# Altium PCB pcb Rev1.1.2_2021-03-04.pcbdoc (part 1 of 2)
Units mil, origin at the board's own origin, x right, y up, seen from the top; angles counter-clockwise.
Board outline 3907.67 x 3907.67 mil, 2 copper layers (Top Layer, Bottom Layer); 144 components, 104 nets, 451 pads, 133 vias.
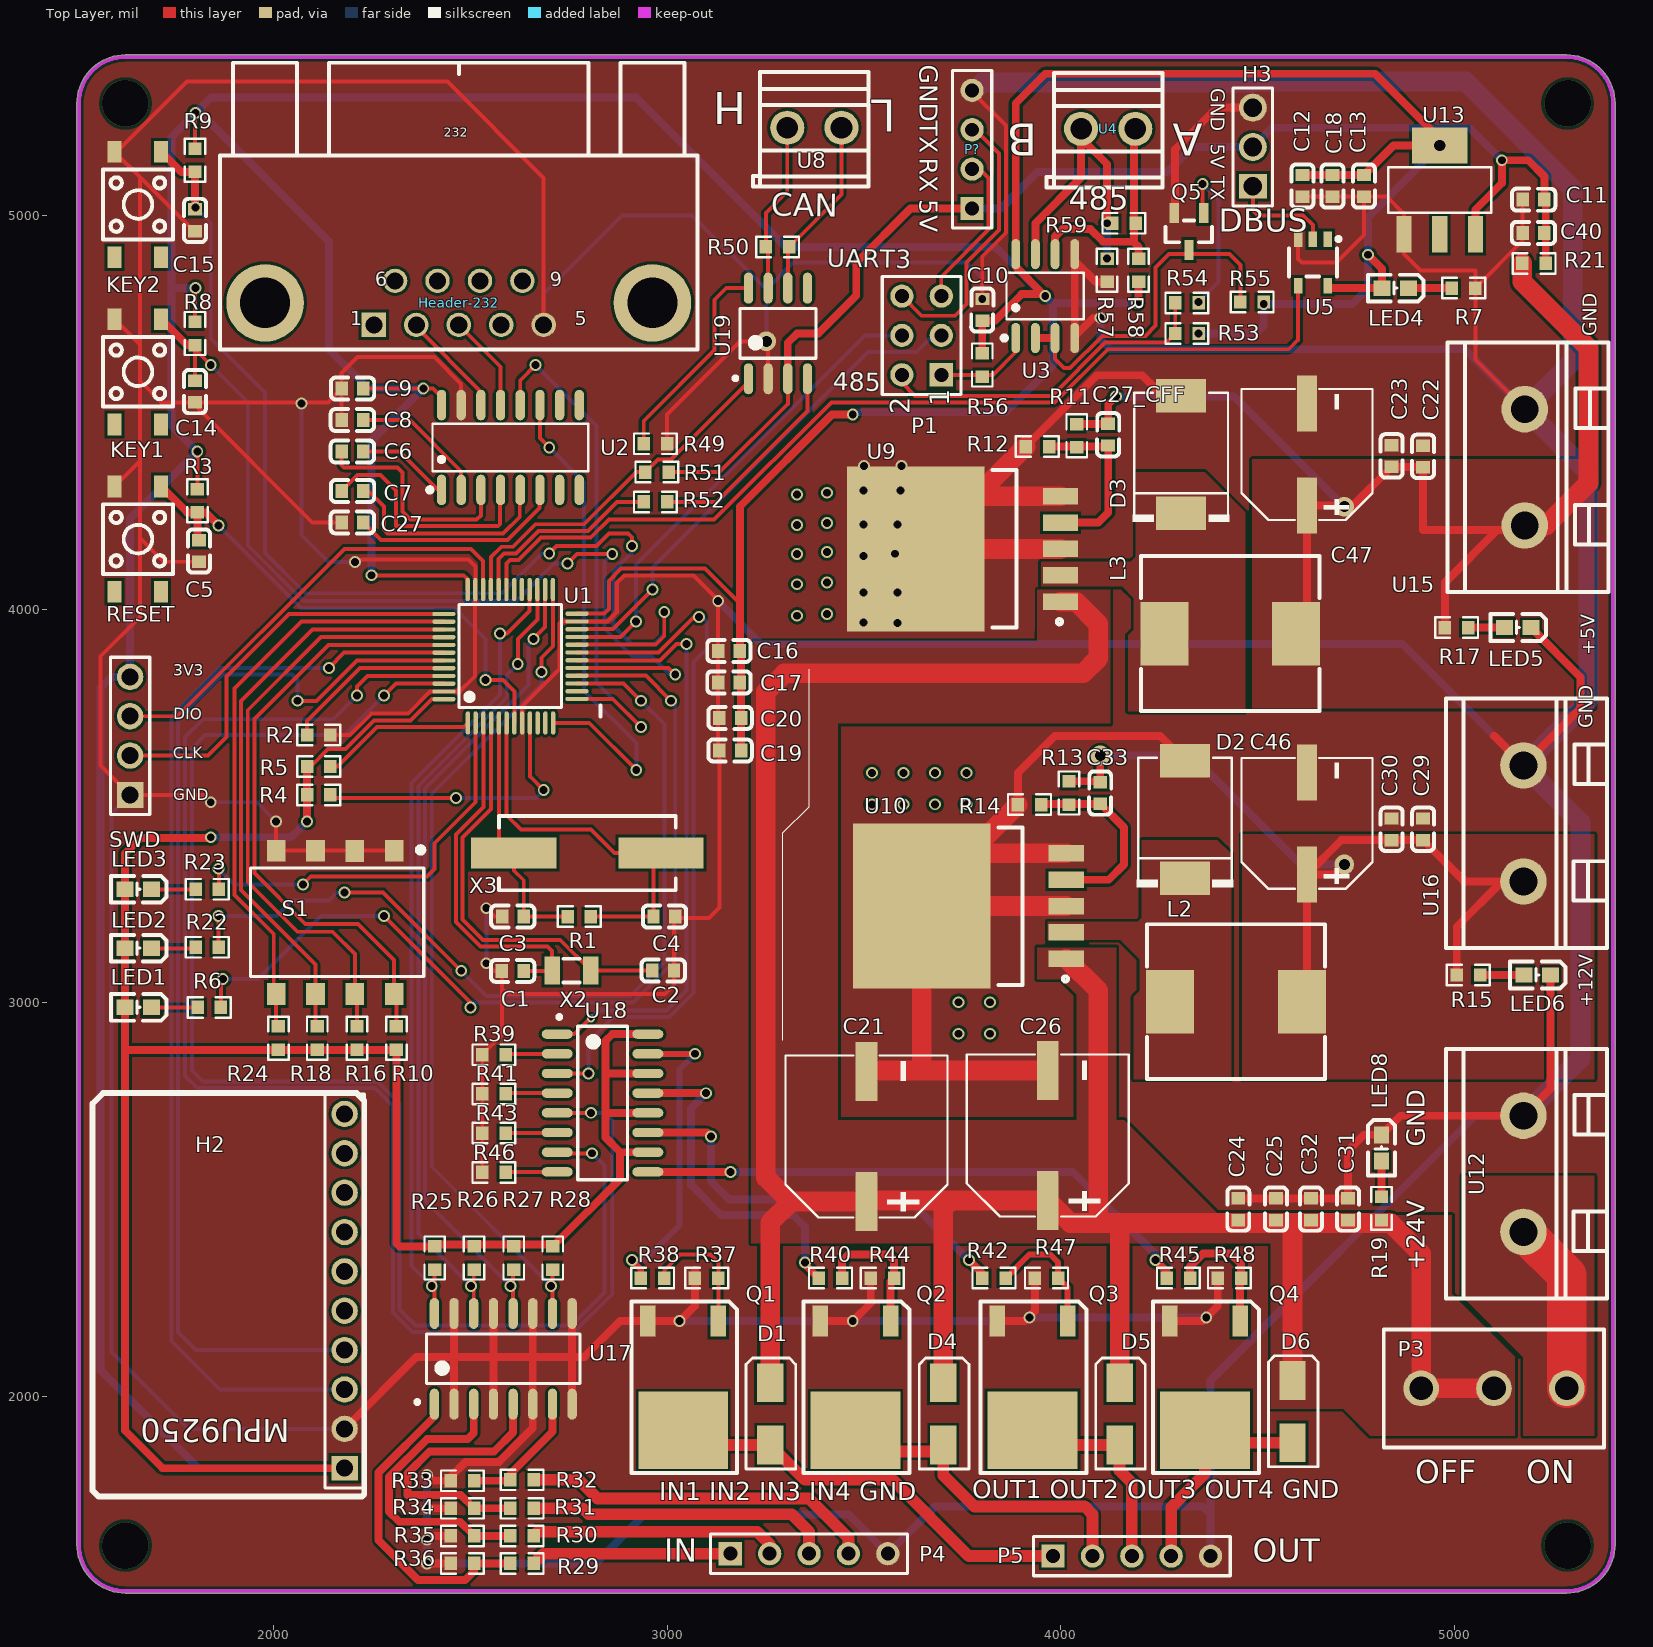
[diagram p0: Top Layer view]
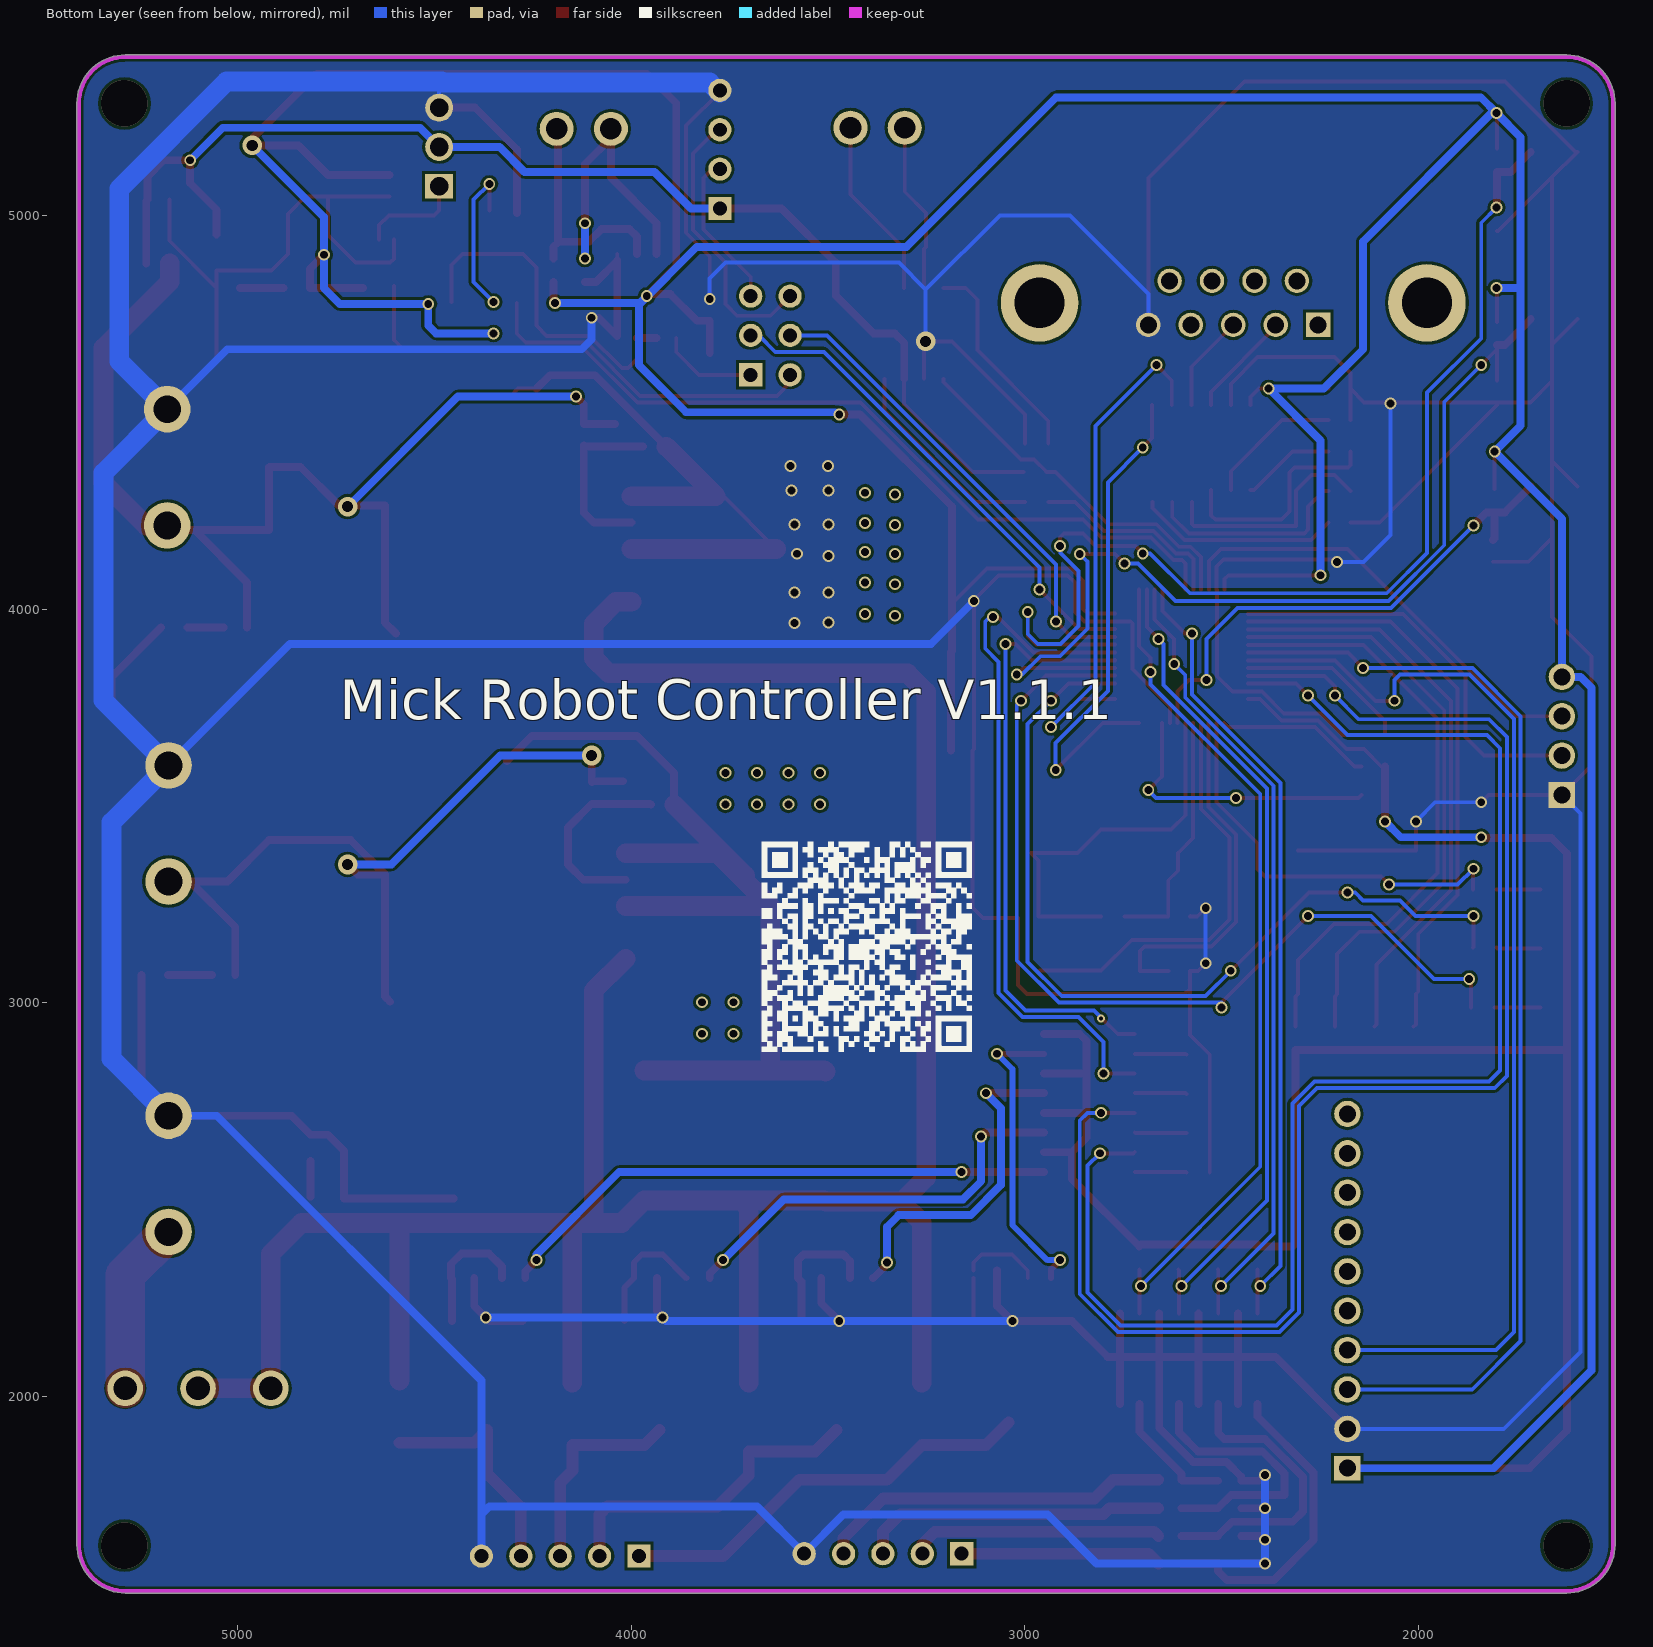
[diagram p1: Bottom Layer view, seen from below]

## Layer stack, top to bottom
Top Solder: solder mask 0.4, Solder Resist, Dk 3.5
Top Layer: signal copper 1.4
Dielectric1: dielectric 12.6, FR-4, Dk 4.8
Bottom Layer: signal copper 1.4
Bottom Solder: solder mask 0.4, Solder Resist, Dk 3.5

## Board outline
1499.98,1623.11 1499.98,5284.53 cw(c1623.11,5284.53) 1623.11,5407.65 5284.53,5407.65 cw(c5284.53,5284.53) 5407.65,5284.53 5407.65,1623.11 cw(c5284.53,1623.11) 5284.53,1499.98 1623.11,1499.98 cw(c1623.11,1623.11)

## Design rules (kind name [scope] priority, off if disabled: settings)
Clearance [All] p1: gap=7 ignorepadtopadclearanceinfootprint=FALSE except(0: Arc-Hole Track-Hole SMDPad-Hole THPad-Hole Via-Hole Fill-Hole Poly-Hole Region-Hole Text-Hole)
HoleSize [All] p1: absolutevalues=TRUE maxlimit=1000 minlimit=1 maxpercent=80.000 minpercent=20.000
HoleToHoleClearance [All] p1: gap=0 allowstackedmicrovias=TRUE
MinimumSolderMaskSliver [All] p1: minsoldermaskwidth=0
PolygonConnect [All] p1: connectstyle=Direct reliefconductorwidth=10 reliefentries=4 polygonreliefangle="90 Angle" airgapwidth=10
RoutingVias [All] p1: holewidth=28 width=50 viastyle="Through Hole" minholewidth=28 minwidth=50 maxholewidth=28 maxwidth=50
SilkToSilkClearance [All] p1: silktosilkclearance=0
SilkToSolderMaskClearance [IsPad] p1: minsilkscreentomaskgap=0 clearancetoexposedcopper=TRUE
SolderMaskExpansion [All] p1: expansion=4
Width [InNet('+3V3')] p1: maxlimit=100 minlimit=10 preferedwidth=20 toplayer_maxwidth=25 minimp=50.000000 maximp=50.000000 favimp=50.000000
25 further rules are at their usual default settings.

## Classes and differential pairs
component class sch_Rev1.1.1_2021-03-04: C1 C2 C3 C4 C5 C6 C7 C8 C9 C10 C11 C12 C13 C14 C15 C16 C17 C18 C19 C20 C21 C22 C23 C24 C25 C26 C27 C27_CFF C29 C30 C31 C32 C33 C40 C46 C47 D2 D3 H2 H3 Header-232 KEY1 KEY2 L2 L3 LED1 LED2 LED3 LED4 LED5 LED6 LED8 P1 P3 P? Q5 R1 R2 R3 R4 R5 R6 R7 R8 R9 R10 R11 R12 R13 R14 R15 R16 R17 R18 R19 R21 R22 R23 R24 R49 R50 R51 R52 R53 R54 R55 R56 R57 R58 R59 RESET S1 SWD U1 U2 U3 U4 U5 U8 U9 U10 U12 U13 U15 U16 U19 X2 X3
component class Sheet3: D1 D4 D5 D6 P4 P5 Q1 Q2 Q3 Q5 R25 R26 R27 R28 R29 R30 R31 R32 R33 R34 R35 R36 R37 R38 R39 R40 R41 R42 R43 R44 R45 R46 R47 R48 U17 U18

## Components (designator, comment, footprint, x,y, rotation, side; value= is the part's Value field where it differs from the comment)
C1 "15pF" C0603 2607.27,3080.55 r0 top
C2 "15pF" C0603 2989.17,3081.55 r180 top
C3 "22pF" C0603 2607.56,3218.55 r0 top
C4 "22pF" C0603 2992.45,3218.55 r180 top
C5 "100nF" C0603 1810,4147.64 r90 top
C6 "100nF" C0603 2200,4400 r0 top
C7 "100nF" C0603 2200,4300 r180 top
C8 "100nF" C0603 2200,4480 r0 top
C9 "100nF" C0603 2200,4560 r180 top
C10 "100nF" C0603 3800.11,4760 r90 top
C11 "100nF" C0603 5200.58,5040.02 r180 top
C12 "100nF" C0603 4613.61,5075.1 r90 top
C13 "100nF" C0603 4769.8,5075.1 r90 top
C14 "100nF" C0603 1800,4552.64 r90 top
C15 "100nF" C0603 1800,4987.64 r90 top
C16 "100nF" C0603 3156.58,3893.64 r0 top
C17 "100nF" C0603 3156.58,3813.64 r0 top
C18 "100nF" C0603 4689.8,5075.1 r90 top
C19 "100nF" C0603 3159.78,3640.47 r0 top
C20 "100nF" C0603 3159.78,3723.34 r0 top
C21 "270uF" CAP-SMD_BD10.0-L10.3-W10.3-RD 3505.88,2660 r90 top
C22 "1uF" C0603 4920,4387.63 r270 top
C23 "10nF" C0603 4840,4388.79 r270 top
C24 "1uF" C0603 4450.32,2475.12 r270 top
C25 "10nF" C0603 4546.12,2475.12 r270 top
C26 "270uF" CAP-SMD_BD10.0-L10.3-W10.3-RD 3966.54,2662.36 r90 top
C27 "100nF" C0603 2200,4220 r0 top
C27_CFF "3.3nF" C0603 4120,4442.96 r90 top
C29 "1uF" C0603 4920,3440.28 r270 top
C30 "10nF" C0603 4840,3440.28 r270 top
C31 "1uF" C0603 4729.35,2475.12 r270 top
C32 "10nF" C0603 4635.16,2475.12 r270 top
C33 "1nF" C0603 4099.77,3532.64 r90 top
C40 "470nF" C0603 5200.58,4955.37 r0 top
C46 "220uF" CAP-SMD_BD8.0-L8.3-W8.3-RD 4625,3455.28 r90 top
C47 "220uF" CAP-SMD_BD8.0-L8.3-W8.3-RD 4625,4392.64 r90 top
D1 "SMAJ5.0A" DO214-SMA-SOAC 3260,1960 r90 top
D2 "B540C-13-F" SMC_L6.9-W5.9-LS7.9-RD 4315,3465.28 r90 top
D3 "B540C-13-F" SMC_L6.9-W5.9-LS7.9-RD 4305,4392.64 r90 top
D4 "SMAJ5.0A" DO214-SMA-SOAC 3700,1960 r90 top
D5 "SMAJ5.0A" DO214-SMA-SOAC 4148.04,1960 r90 top
D6 "SMAJ5.0A" DO214-SMA-SOAC 4587.04,1966 r90 top
H2 "Header-MPU9250" HDR-TH_10P-P2.54-V 2180,2267.22 r90 top
H3 "Header-3P-DBUS" HDR-TH_3P-P2.54-V 4487.37,5173.78 r90 top
Header-232 "Header-232" DSUB-TH_9P-P2.74-S2.84_L18.5-W30.8-M 2470,4777.64 r180 top
KEY1 "TS-1109S-B-B" SW-SMD_4P-L4.5-W4.5-P3.00-LS7.0 1655,4602.64 r90 top
KEY2 "TS-1109S-B-B" SW-SMD_4P-L4.5-W4.5-P3.00-LS7.0 1655,5027.64 r90 top
L2 "68uH 3A" IND-SMD_L11.5-W10.0_104CDMCCDS 4444.58,3002.28 r0 top
L3 "68uH 3A" IND-SMD_L11.5-W10.0_104CDMCCDS 4430,3937.64 r0 top
LED1 "KT-0603R" LED0603-R-RD 1656,2987.91 r180 top
LED2 "KT-0603R" LED0603-R-RD 1656,3138.05 r180 top
LED3 "KT-0603R" LED0603-R-RD 1656,3287.91 r180 top
LED4 "KT-0603R" LED0603-R-RD 4849.06,4815.19 r180 top
LED5 "KT-0603R" LED0603-R-RD 5160.4,3952.94 r180 top
LED6 "KT-0603R" LED0603-R-RD 5210,3070.28 r180 top
LED8 "KT-0603R" LED0603-R-RD 4814.36,2630.72 r270 top
P1 "Header 3X2" HDR2X3 3695.89,4595.02 r90 top
P3 "Header 3" SW-3 5100,2020 r0 top
P4 "Header 5" HDR1X5 3160,1600 r0 top
P5 "Header 5" HDR1X5 3980,1593.98 r0 top
P? "Header 4" HDR1X4 3774.1,5017.63 r90 top
Q1 "MOSFET-N" TO252-3 3042.36,2120 r270 top
Q2 "MOSFET-N" TO252-3 3480,2120 r270 top
Q3 "MOSFET-N" TO252-3 3930,2120 r270 top
Q4 "MOSFET-N" TO252-3 4368.04,2120 r270 top
Q5 "S8050-J3Y" S8050-J3Y 4328.04,4960.08 r90 top (schematic designator Q4)
R1 "1M" R0603 2775.98,3218.55 r180 top
R2 "10K" R0603 2114.25,3680 r0 top
R3 "10K" R0603 1805.84,4275.19 r270 top
R4 "0" R0603 2114.25,3527.64 r180 top
R5 "0" R0603 2114.25,3600 r180 top
R6 "1K" R0603 1836,2987.91 r0 top
R7 "1K" R0603 5023.02,4815.19 r0 top
R8 "10K" R0603 1800,4700 r270 top
R9 "10K" R0603 1800,5140 r270 top
R10 "10K" R0603 2311.62,2909.72 r270 top
R11 "1.2K" R0603 4040,4440 r90 top
R12 "390" R0603 3940,4412.64 r180 top
R13 "4.7K" R0603 4020.35,3532.64 r90 top
R14 "560" R0603 3920,3502.98 r180 top
R15 "5.1K" R0603 5035,3070.28 r0 top
R16 "10K" R0603 2211.62,2909.72 r270 top
R17 "5.1K" R0603 5005,3952.64 r0 top
R18 "10K" R0603 2110.6,2909.72 r270 top
R19 "5.1K" R0603 4814.36,2477.22 r90 top
R21 "0" R0603 5201.84,4878.09 r0 top
R22 "1K" R0603 1831,3140.55 r0 top
R23 "1K" R0603 1831,3287.91 r0 top
R24 "10K" R0603 2011.62,2909.72 r270 top
R25 "4.7K" R0603 2408.82,2351.22 r90 top
R26 "4.7K" R0603 2509,2351.22 r90 top
R27 "4.7K" R0603 2609.79,2351.22 r90 top
R28 "4.7K" R0603 2708.82,2351.22 r90 top
R29 "2.4K" R0603 2630.86,1575.29 r180 top
R30 "2.4K" R0603 2630.86,1645.29 r180 top
R31 "2.4K" R0603 2630.86,1715.29 r180 top
R32 "2.4K" R0603 2630.86,1787.67 r180 top
R33 "10K" R0603 2479.35,1785.29 r0 top
R34 "10K" R0603 2479.35,1715.29 r0 top
R35 "10K" R0603 2479.35,1645.29 r0 top
R36 "10K" R0603 2479.35,1575.29 r0 top
R37 "10K" R0603 3099.71,2300 r180 top
R38 "100R" R0603 2962.36,2300 r0 top
R39 "510R" R0603 2559.31,2867.72 r0 top
R40 "100R" R0603 3414.41,2300 r0 top
R41 "510R" R0603 2559.31,2768.05 r0 top
R42 "100R" R0603 3829.76,2300 r0 top
R43 "510R" R0603 2559.31,2668.38 r0 top
R44 "10K" R0603 3546.23,2300 r180 top
R45 "100R" R0603 4298.38,2300 r0 top
R46 "510R" R0603 2559.31,2568.72 r0 top
R47 "10K" R0603 3963.19,2300 r180 top
R48 "10K" R0603 4428.04,2300 r180 top
R49 "10K" R0603 2969.66,4420 r180 top
R50 "120R" R0603 3280,4920 r0 top
R51 "4.7K" R0603 2973.54,4347.7 r180 top
R52 "470R" R0603 2969.65,4272.3 r0 top
R53 "10K" R0603 4320,4700 r180 top
R54 "1K" R0603 4320,4777.63 r0 top
R55 "10K" R0603 4485.43,4780 r180 top
R56 "10K" R0603 3800.11,4620 r270 top
R57 "10K" R0603 4117.23,4860.57 r90 top
R58 "10K" R0603 4197.23,4860.57 r270 top
R59 "120" R0603 4160,4980 r0 top
RESET "TS-1109S-B-B" SW-SMD_4P-L4.5-W4.5-P3.00-LS7.0 1655,4177.64 r90 top
S1 "SW-DIP4" SW-SOP-8 2080,3200 r270 top
SWD "2.54-4P" HDR-TH_4P-P2.54-V 1635,3677.64 r90 top
U1 "STM32F103C8T6" LQFP-48_48P-L7.0-W7.0-P0.50-LS9.0-BL 2601.21,3880 r0 top
U2 "SP3232EEN-L/TR" SOIC-16_L9.9-W3.9-P1.27-LS6.0-BL 2601.21,4410.35 r0 top
U3 "SP3485EN-L/TR" SOIC-8_L5.0-W4.0-P1.27-LS6.0-BL 3960,4795.02 r0 top
U4 "KF128L-3.5-2P" CONN-TH_P3.50_KF128L-3.5-2P 4120,5220 r0 top
U5 "SN74LVC1G14DBVR_C434069" SOT-23-5_L3.0-W1.7-P0.95-LS2.8-BR 4640,4880 r90 top
U8 "KF128L-3.5-2P" CONN-TH_P3.50_KF128L-3.5-2P 3373.53,5222.64 r0 top
U9 "LM2596R-ADJ" TO-263-5_L10.2-W9.9-P1.70-LS14.4-TL 3815,4152.64 r180 top
U10 "LM2596R-ADJ" TO-263-5_L10.2-W9.9-P1.70-LS14.4-TL 3830,3245.28 r180 top
U12 "DB128V-7.5-2P" CONN-TH_2P-P7.50_DB128V-7.5-2P 5175,2565.05 r270 top
U13 "AMS1117-3.3" SOT-223-3_L6.5-W3.4-P2.30-LS7.0-BR 4962.26,5064.85 r270 top
U15 "DB128V-7.5-2P" CONN-TH_2P-P7.50_DB128V-7.5-2P 5178.29,4360 r270 top
U16 "DB128V-7.5-2P" CONN-TH_2P-P7.50_DB128V-7.5-2P 5175,3455.28 r270 top
U17 "LTV247" SOIC-16-M 2377.08,1968.16 r90 top
U18 "LTV247" SOIC-16-M 2708.35,2951 r0 top
U19 "TJA1050" SOP-8 3280,4700 r90 top
X2 "32.768KHz" FC-135R_L3.2-W1.5 2756.64,3081.55 r180 top
X3 "8MHz" OSC-SMD_L11.5-W4.8-P9.50 2796.81,3380 r90 top

## Footprints (in the part's own frame and the unit in brackets; to place one, negate y for a bottom-side part, rotate by r counter-clockwise, add the part's x,y. Pads: shape width x height; smd on the part's side, far side on the other; paste and mask are expansions set on the pad)
C0603 [mm]
  rect 0.8x0.9 smd: 1(-0.7,0) 2(0.7,0)
  silkscreen extent -1.41,-0.71 1.39,0.72
CAP-SMD_BD8.0-L8.3-W8.3-RD [mm]
  rect 3.61x1.26 smd: 1(-3.295,0) 2(3.295,0)
  silkscreen extent -4.23,-4.23 4.23,4.23
CAP-SMD_BD10.0-L10.3-W10.3-RD [mm]
  rect 3.81x1.4 smd: 1(-4.195,0) 2(4.195,0)
  silkscreen extent -5.23,-5.23 5.23,5.23
CONN-TH_2P-P7.50_DB128V-7.5-2P [mm]
  round 3 hole 1.8: 1(-3.75,0) 2(3.75,0)
  silkscreen extent -8.05,-5 8.05,5.4
CONN-TH_P3.50_KF128L-3.5-2P [mm]
  round 2.2 hole 1.4: 1(-1.75,0) 2(1.75,0)
  silkscreen extent -3.97,-3.8 3.5,3.6
DO214-SMA-SOAC [mil]
  rect 98.43x66.93 smd: 1(-84,-1) 2(74,-1)
  silkscreen extent -145,-66 137,60
DSUB-TH_9P-P2.74-S2.84_L18.5-W30.8-M [mil]
  round 196.85 hole 127.95: 0(-492.13,0) 0(492.12,0)
  rect 62x62 hole 43.31: 1(215.75,55.91)
  round 62 hole 43.31: 2(107.87,55.91) 3(0,55.91) 4(-107.87,55.91) 5(-215.75,55.91) 6(161.81,-55.91) 7(53.94,-55.91) 8(-53.94,-55.91) 9(-161.81,-55.91)
  silkscreen extent -606,-610 606,118
FC-135R_L3.2-W1.5 [mm]
  rect 1x1.8 smd: 1(-1.25,0) 2(1.25,0)
  silkscreen extent -0.51,-0.76 0.51,0.76
HDR1X4 [mm] "Connector; Header; 4 Position"
  rect 1.5x1.5 hole 0.9: 1(0,0)
  round 1.5 hole 0.9: 2(2.54,0) 3(5.08,0) 4(7.62,0)
  silkscreen extent -1.27,-1.27 8.89,1.27
HDR1X5 [mm] "Connector; Header; 5 Position"
  rect 1.5x1.5 hole 0.9: 1(0,0)
  round 1.5 hole 0.9: 2(2.54,0) 3(5.08,0) 4(7.62,0) 5(10.16,0)
  silkscreen extent -1.27,-1.27 11.43,1.27
HDR2X3 [mm] "Connector; Header; 3x2 Position"
  rect 1.5x1.5 hole 0.9: 1(0,0)
  round 1.5 hole 0.9: 2(0,2.54) 3(2.54,0) 4(2.54,2.54) 5(5.08,0) 6(5.08,2.54)
  silkscreen extent -1.27,-1.27 6.35,3.81
HDR-TH_3P-P2.54-V [mm]
  rect 1.575x1.8 hole 1.2: 1(-2.54,0)
  round 1.8 hole 1.2: 2(0,0) 3(2.54,0)
  silkscreen extent -3.81,-1.27 3.81,1.27
HDR-TH_4P-P2.54-V [mm]
  rect 1.7x1.7 hole 1.1: 1(-3.81,0)
  round 1.7 hole 1.1: 2(-1.27,0) 3(1.27,0) 4(3.81,0)
  silkscreen extent -5.08,-1.27 5.08,1.27
HDR-TH_10P-P2.54-V [mm]
  rect 1.575x1.7 hole 1.1: 1(-11.43,0)
  round 1.7 hole 1.1: 2(-8.89,0) 3(-6.35,0) 4(-3.81,0) 5(-1.27,0) 6(1.27,0) 7(3.81,0) 8(6.35,0) 9(8.89,0) 10(11.43,0)
  silkscreen extent -12.7,-1.27 12.7,1.27
IND-SMD_L11.5-W10.0_104CDMCCDS [mm]
  rect 3.1x4.1 smd: 1(-4.25,0) 2(4.25,0)
  silkscreen extent -5.75,-5 5.75,5
LED0603-R-RD [mil]
  rect 43x39 smd: 1(33.5,0) 2(-33.5,0)
  silkscreen extent -72,-34 70,34
LQFP-48_48P-L7.0-W7.0-P0.50-LS9.0-BL [mm]
  oval 0.28x1.5 smd: 1(-2.743,-4.305) 2(-2.243,-4.305) 3(-1.742,-4.305) 4(-1.242,-4.305) 5(-0.742,-4.305) 6(-0.241,-4.305) 7(0.257,-4.305) 8(0.757,-4.305) 9(1.257,-4.305) 10(1.758,-4.305) 11(2.258,-4.305) 12(2.758,-4.305) 25(2.743,4.305) 26(2.243,4.305) 27(1.742,4.305) 28(1.242,4.305) 29(0.742,4.305) 30(0.241,4.305) 31(-0.257,4.305) 32(-0.757,4.305) 33(-1.257,4.305) 34(-1.758,4.305) 35(-2.258,4.305) 36(-2.758,4.305)
  oval 1.5x0.28 smd: 13(4.293,-2.756) 14(4.293,-2.256) 15(4.293,-1.755) 16(4.293,-1.255) 17(4.293,-0.754) 18(4.293,-0.254) 19(4.293,0.244) 20(4.293,0.744) 21(4.293,1.245) 22(4.293,1.745) 23(4.293,2.245) 24(4.293,2.746) 37(-4.293,2.73) 38(-4.293,2.23) 39(-4.293,1.73) 40(-4.293,1.229) 41(-4.293,0.729) 42(-4.293,0.229) 43(-4.293,-0.269) 44(-4.293,-0.77) 45(-4.293,-1.27) 46(-4.293,-1.77) 47(-4.293,-2.271) 48(-4.293,-2.771)
  silkscreen extent -3.33,-3.31 3.3,3.34
OSC-SMD_L11.5-W4.8-P9.50 [mm]
  rect 2x5.5 smd: 1(0,4.75) 2(0,-4.75)
  silkscreen extent -2.4,-5.7 2.4,5.7
R0603 [mil]
  rect 31.75x34.02 smd: 1(-29.66,0) 2(29.65,0)
  silkscreen extent -55,-26 55,26
S8050-J3Y [mm]
  rect 1.3x0.6 smd: 1(1.18,-0.876) 2(1.18,1.024) 3(-1.22,0.074)
  silkscreen extent -0.72,-1.43 0.68,1.57
SMC_L6.9-W5.9-LS7.9-RD [mm]
  rect 2.158x3.24 smd: 1(-3.786,0) 2(3.786,0)
  silkscreen extent -4.36,-3.1 3.98,3.1
SOIC-8_L5.0-W4.0-P1.27-LS6.0-BL [mil]
  oval 22.38x76.78 smd: 1(-75,-106.5) 2(-25,-106.5) 3(25,-106.5) 4(75,-106.5) 5(75,106.5) 6(25,106.5) 7(-25,106.5) 8(-75,106.5)
  silkscreen extent -110,-112 98,59
SOIC-16-M [mm]
  oval 2x0.6 smd: 1(0.301,-0.787) 2(0.301,-2.057) 3(0.301,-3.327) 4(0.301,-4.597) 5(0.301,-5.867) 6(0.301,-7.137) 7(0.301,-8.407) 8(0.301,-9.677) 9(6.151,-9.677) 10(6.151,-8.407) 11(6.151,-7.137) 12(6.151,-5.867) 13(6.151,-4.597) 14(6.151,-3.327) 15(6.151,-2.057) 16(6.151,-0.787)
  silkscreen extent 0.31,-10.18 4.83,0.45
SOIC-16_L9.9-W3.9-P1.27-LS6.0-BL [mil]
  oval 23.7x77.6 smd: 1(-175,-107.7) 2(-125,-107.7) 3(-75,-107.7) 4(-25,-107.7) 5(25,-107.7) 6(75,-107.7) 7(125,-107.7) 8(175,-107.7) 9(175,107.7) 10(125,107.7) 11(75,107.7) 12(25,107.7) 13(-25,107.7) 14(-75,107.7) 15(-125,107.7) 16(-175,107.7)
  silkscreen extent -211,-114 198,60
SOP-8 [mm]
  oval 2x0.6 smd: 1(-2.922,1.88) 2(-2.922,0.61) 3(-2.922,-0.66) 4(-2.922,-1.93) 5(2.929,-1.93) 6(2.929,-0.66) 7(2.929,0.61) 8(2.929,1.88)
  silkscreen extent -3.02,-2.47 1.6,2.85
SOT-23-5_L3.0-W1.7-P0.95-LS2.8-BR [mm]
  rect 1x0.55 smd: 1(1.5,-0.95) 2(1.5,0) 3(1.5,0.95) 4(-1.5,0.95) 5(-1.5,-0.95)
  silkscreen extent -0.9,-1.78 1.65,1.55
SOT-223-3_L6.5-W3.4-P2.30-LS7.0-BR [mm]
  rect 2.34x0.98 smd: 1(2.87,-2.3) 2(2.87,0) 3(2.87,2.3)
  rect 2.34x3.6 smd: 4(-2.87,0)
  silkscreen extent -1.47,-3.33 1.47,3.33
SW-3 [mil]
  round 90.74 hole 60: 1(-185,0) 2(0,0) 3(185,0)
  silkscreen extent -280,-150 280,150
SW-SMD_4P-L4.5-W4.5-P3.00-LS7.0 [mm]
  rect 1.4x0.9 smd: 1(-3.4,1.5) 2(3.4,1.5) 3(-3.4,-1.5) 4(3.4,-1.5)
  silkscreen extent -2.25,-2.25 2.25,2.25
SW-SOP-8 [mm]
  rect 1.4x1.2 smd: 1(-4.725,5.741) 2(-4.7,3.201) 3(-4.725,0.661) 4(-4.725,-1.879) 5(4.529,-1.879) 6(4.529,0.661) 7(4.529,3.201) 8(4.529,5.741)
  silkscreen extent -5.01,-3.53 3.4,7.68
TO252-3 [mil]
  rect 196.85x228.35 smd: 1(206,-2)
  rect 78.74x39.37 smd: 2(-71,87) 3(-71,-92)
  silkscreen extent -121,-134 315,135
TO-263-5_L10.2-W9.9-P1.70-LS14.4-TL [mil]
  rect 90x42.1 smd: 1(-183.77,134) 2(-183.77,67) 3(-183.77,0) 4(-183.77,-67) 5(-183.77,-134)
  rect 350x419.68 smd: 6(183.77,0)
  silkscreen extent -188,-200 -11,200

## Part data
C1 C2: BOM_JLCPCB SMD=Yes, BOM_Manufacturer=SAMSUNG, BOM_Manufacturer Part=CL10C150JB8NNNC, BOM_Supplier=LCSC, BOM_Supplier Part=C1644, nameAlias=Capacitance, SMT Type=Basic, spicePre=C, spiceSymbolName=CL10C150JB8NNNC
C3 C4: BOM_JLCPCB SMD=Yes, BOM_Manufacturer=SAMSUNG, BOM_Manufacturer Part=CL10C220JB8NNNC, BOM_Supplier=LCSC, BOM_Supplier Part=C1653, nameAlias=Capacitance, SMT Type=Basic, spicePre=C, spiceSymbolName=CL10C220JB8NNNC
C5 C6 C7 C8 C9 C10 C11 C12 C13 C14 C15 C16 C17 C18 C19 C20 C27: BOM_JLCPCB SMD=Yes, BOM_Manufacturer=YAGEO, BOM_Manufacturer Part=CC0603KRX7R9BB104, BOM_Supplier=LCSC, BOM_Supplier Part=C14663, nameAlias=Capacitance, SMT Type=Basic, spicePre=C, spiceSymbolName=CC0603KRX7R9BB104
C21 C26: BOM_JLCPCB SMD=Yes, BOM_Manufacturer=Lelon, BOM_Manufacturer Part=HBW271M1VTR-1010K, BOM_Supplier=LCSC, BOM_Supplier Part=C311670, Contributor=LCSC, nameAlias=Capacitance, SMT Type=Extend, spicePre=C, spiceSymbolName=HBW271M1VTR-1010K
C22 C24 C29 C31: BOM_JLCPCB SMD=Yes, BOM_Manufacturer=SAMSUNG, BOM_Manufacturer Part=CL10A105KB8NNNC, BOM_Supplier=LCSC, BOM_Supplier Part=C15849, nameAlias=Capacitance, SMT Type=Basic, spicePre=C, spiceSymbolName=CL10A105KB8NNNC
C23 C25 C30 C32: BOM_JLCPCB SMD=Yes, BOM_Manufacturer=FH, BOM_Manufacturer Part=0603B103K500NT, BOM_Supplier=LCSC, BOM_Supplier Part=C57112, nameAlias=Capacitance, SMT Type=Basic, spicePre=C, spiceSymbolName=0603B103K500NT
C27_CFF: BOM_JLCPCB SMD=Yes, BOM_Manufacturer=SAMSUNG, BOM_Manufacturer Part=CL10B332KB8NNNC, BOM_Supplier=LCSC, BOM_Supplier Part=C1613, nameAlias=Capacitance, SMT Type=Basic, spicePre=C, spiceSymbolName=CL10B332KB8NNNC
C33: BOM_JLCPCB SMD=Yes, BOM_Manufacturer=SAMSUNG, BOM_Manufacturer Part=CL10B102KB8NNNC, BOM_Supplier=LCSC, BOM_Supplier Part=C1588, nameAlias=Capacitance, SMT Type=Basic, spicePre=C, spiceSymbolName=CL10B102KB8NNNC
C40: BOM_JLCPCB SMD=Yes, BOM_Manufacturer=SAMSUNG, BOM_Manufacturer Part=CL21B474KBFNNNE, BOM_Supplier=LCSC, BOM_Supplier Part=C13967, nameAlias=Capacitance, SMT Type=Basic, spicePre=C, spiceSymbolName=CL21B474KBFNNNE
C46 C47: BOM_JLCPCB SMD=Yes, BOM_Manufacturer=Lelon, BOM_Manufacturer Part=VEH221M1VTR-0810, BOM_Supplier=LCSC, BOM_Supplier Part=C311611, Contributor=LCSC, nameAlias=Capacitance, SMT Type=Extend, spicePre=C, spiceSymbolName=VEH221M1VTR-0810
D1 D4 D5 D6: library part Diode, "Default Diode", Code_JEDEC=DO-214-AB, LatestRevisionDate=17-Jul-2002, LatestRevisionNote="Re-released for DXP Platform.", PackageDescription="DO-214-AB/SMC; 2 C-Bend Leads; Body 7.9 x 5.9 mm, inc. leads (LxW)", PackageReference=SMC, PackageVersion=Sep-1996, Published=8-Jun-2000, Publisher="Altium Limited"
D2 D3: BOM_JLCPCB SMD=Yes, BOM_Manufacturer=DIODES, BOM_Manufacturer Part=B540C-13-F, BOM_Supplier=LCSC, BOM_Supplier Part=C72264, SMT Type=Extend, spicePre=D, spiceSymbolName=B540C-13-F
H2: library part Header-Male-2.54_1x10, BOM_JLCPCB SMD=Yes, BOM_Manufacturer Part=Headers??Pins2.54mm1*10P, BOM_Supplier=LCSC, BOM_Supplier Part=C57369, image=http://image.lceda.cn/szlcsc/C57369.jpg, SMT Type=Extend, spicePre=H, spiceSymbolName=Header-Male-2.54_1x10
H3: library part Z-211-0311-0021-001, BOM_JLCPCB SMD=Yes, BOM_Manufacturer=ZHENGLING, BOM_Manufacturer Part=Z-211-0311-0021-001, BOM_Supplier=LCSC, BOM_Supplier Part=C152153, Contributor=LCSC, SMT Type=Extend, spicePre=H, spiceSymbolName=Z-211-0311-0021-001
Header-232: library part 5747844-6, BOM_JLCPCB SMD=Yes, BOM_Manufacturer="TE Connectivity", BOM_Manufacturer Part=5747844-6, BOM_Supplier=LCSC, BOM_Supplier Part=C305943, Contributor=LCSC, SMT Type=Extend, spicePre=D, spiceSymbolName=5747844-6
KEY1 KEY2 RESET: BOM_JLCPCB SMD=Yes, BOM_Manufacturer="XKB Enterprise", BOM_Manufacturer Part=TS-1109S-B-B, BOM_Supplier=LCSC, BOM_Supplier Part=C480315, Contributor=LCSC, SMT Type=Extend, spicePre=S, spiceSymbolName=TS-1109S-B-B
L2: BOM_JLCPCB SMD=Yes, BOM_Manufacturer=YJYCOIN, BOM_Manufacturer Part=YSPI1050-680M, BOM_Supplier=LCSC, BOM_Supplier Part=C497902, Contributor=LCSC, nameAlias=Inductance, SMT Type=Extend, spicePre=L, spiceSymbolName=YSPI1050-680M
L3: library part 68uH, BOM_JLCPCB SMD=Yes, BOM_Manufacturer=YJYCOIN, BOM_Manufacturer Part=YSPI1050-680M, BOM_Supplier=LCSC, BOM_Supplier Part=C497902, Contributor=LCSC, nameAlias=Inductance, SMT Type=Extend, spicePre=L, spiceSymbolName=YSPI1050-680M
LED1: library part R, BOM_JLCPCB SMD=Yes, BOM_Manufacturer=KENTO, BOM_Manufacturer Part=KT-0603R, BOM_Supplier=LCSC, BOM_Supplier Part=C2286, image=//image.lceda.cn/szlcsc/C2286.jpg, SMT Type=Basic, spicePre=L, spiceSymbolName=KT-0603R
LED2: library part YR, BOM_JLCPCB SMD=Yes, BOM_Manufacturer=EVERLIGHT, BOM_Manufacturer Part=19-217/GHC-YR1S2/3T, BOM_Supplier=LCSC, BOM_Supplier Part=C72043, image=//image.lceda.cn/szlcsc/C72043.jpg, SMT Type=Basic, spicePre=L, spiceSymbolName=19-217/GHC-YR1S2/3T
LED3 LED4: library part CY, BOM_JLCPCB SMD=Yes, BOM_Manufacturer=EVERLIGHT, BOM_Manufacturer Part=19-213/Y2C-CQ2R2L/3T(CY), BOM_Supplier=LCSC, BOM_Supplier Part=C72038, image=//image.lceda.cn/szlcsc/C72038.jpg, SMT Type=Basic, spicePre=L, spiceSymbolName=19-213/Y2C-CQ2R2L/3T(CY)
LED5: BOM_JLCPCB SMD=Yes, BOM_Manufacturer=KENTO, BOM_Manufacturer Part=KT-0603R, BOM_Supplier=LCSC, BOM_Supplier Part=C2286, image=//image.lceda.cn/szlcsc/C2286.jpg, SMT Type=Basic, spicePre=L, spiceSymbolName=KT-0603R
LED6: library part 19-213/Y2C-CQ2R2L/3T(CY), BOM_JLCPCB SMD=Yes, BOM_Manufacturer=EVERLIGHT, BOM_Manufacturer Part=19-213/Y2C-CQ2R2L/3T(CY), BOM_Supplier=LCSC, BOM_Supplier Part=C72038, image=//image.lceda.cn/szlcsc/C72038.jpg, SMT Type=Basic, spicePre=L, spiceSymbolName=19-213/Y2C-CQ2R2L/3T(CY)
LED8: library part 19-217/GHC-YR1S2/3T, BOM_JLCPCB SMD=Yes, BOM_Manufacturer=EVERLIGHT, BOM_Manufacturer Part=19-217/GHC-YR1S2/3T, BOM_Supplier=LCSC, BOM_Supplier Part=C72043, image=//image.lceda.cn/szlcsc/C72043.jpg, SMT Type=Basic, spicePre=L, spiceSymbolName=19-217/GHC-YR1S2/3T
P1: "Header, 3-Pin, Dual row", LatestRevisionDate=17-Jul-2002, LatestRevisionNote="Re-released for DXP Platform.", Publisher="Altium Limited"
P3: "Header, 3-Pin", LatestRevisionDate=17-Jul-2002, LatestRevisionNote="Re-released for DXP Platform.", Publisher="Altium Limited"
P4 P5: "Header, 5-Pin", LatestRevisionDate=17-Jul-2002, LatestRevisionNote="Re-released for DXP Platform.", Publisher="Altium Limited"
P?: "Header, 4-Pin", LatestRevisionDate=17-Jul-2002, LatestRevisionNote="Re-released for DXP Platform.", Publisher="Altium Limited"
Q1 Q2 Q3 Q4: "N-Channel MOSFET", LatestRevisionDate=17-Jul-2002, LatestRevisionNote="Re-released for DXP Platform.", PackageDescription="TO, Flat Index; 3 In-Line, Axial Leads; Body Dia. 4.6mm; Lead Dia. 0.5 mm (max)", PackageReference=E3, PackageVersion=1995/1996, Published=8-Jun-2000, Publisher="Altium Limited"
R1: BOM_JLCPCB SMD=Yes, BOM_Manufacturer=UniOhm, BOM_Manufacturer Part=0603WAF1004T5E, BOM_Supplier=LCSC, BOM_Supplier Part=C22935, nameAlias="Resistance (Ohms)", SMT Type=Basic, spicePre=R, spiceSymbolName=0603WAF1004T5E
R2 R3 R8 R9 R49 R53 R55 R56 R57 R58: BOM_JLCPCB SMD=Yes, BOM_Manufacturer=UniOhm, BOM_Manufacturer Part=0603WAF1002T5E, BOM_Supplier=LCSC, BOM_Supplier Part=C25804, nameAlias="Resistance (Ohms)", SMT Type=Basic, spicePre=R, spiceSymbolName=0603WAF1002T5E
R4 R5 R21: BOM_JLCPCB SMD=Yes, BOM_Manufacturer=UniOhm, BOM_Manufacturer Part=0603WAF0000T5E, BOM_Supplier=LCSC, BOM_Supplier Part=C21189, nameAlias="Resistance (Ohms)", SMT Type=Basic, spicePre=R, spiceSymbolName=0603WAF0000T5E
R6 R7 R22 R23: BOM_JLCPCB SMD=Yes, BOM_Manufacturer=UniOhm, BOM_Manufacturer Part=0603WAF1001T5E, BOM_Supplier=LCSC, BOM_Supplier Part=C21190, nameAlias="Resistance (Ohms)", SMT Type=Basic, spicePre=R, spiceSymbolName=0603WAF1001T5E
R10 R16 R17 R18 R24 R25 R26 R27 R28 R29 R30 R31 R32 R33 R34 R35 R36 R37 R38 R39 R40 R41 R42 R43 R44 R45 R46 R47 R48: library part 1K, BOM_JLCPCB SMD=Yes, BOM_Manufacturer=UniOhm, BOM_Manufacturer Part=0603WAF1001T5E, BOM_Supplier=LCSC, BOM_Supplier Part=C21190, nameAlias="Resistance (Ohms)", SMT Type=Basic, spicePre=R, spiceSymbolName=0603WAF1001T5E
R11: BOM_JLCPCB SMD=Yes, BOM_Manufacturer=UniOhm, BOM_Manufacturer Part=0603WAF1201T5E, BOM_Supplier=LCSC, BOM_Supplier Part=C22765, nameAlias="Resistance (Ohms)", SMT Type=Basic, spicePre=R, spiceSymbolName=0603WAF1201T5E
R12: BOM_JLCPCB SMD=Yes, BOM_Manufacturer=UniOhm, BOM_Manufacturer Part=0603WAF3900T5E, BOM_Supplier=LCSC, BOM_Supplier Part=C23151, nameAlias="Resistance (Ohms)", SMT Type=Basic, spicePre=R, spiceSymbolName=0603WAF3900T5E
R13: BOM_JLCPCB SMD=Yes, BOM_Manufacturer=UniOhm, BOM_Manufacturer Part=0603WAF4701T5E, BOM_Supplier=LCSC, BOM_Supplier Part=C23162, nameAlias="Resistance (Ohms)", SMT Type=Basic, spicePre=R, spiceSymbolName=0603WAF4701T5E
R14: BOM_JLCPCB SMD=Yes, BOM_Manufacturer=UniOhm, BOM_Manufacturer Part=0603WAF5600T5E, BOM_Supplier=LCSC, BOM_Supplier Part=C23204, nameAlias="Resistance (Ohms)", SMT Type=Basic, spicePre=R, spiceSymbolName=0603WAF5600T5E
R15: library part 2.4K, BOM_JLCPCB SMD=Yes, BOM_Manufacturer=UniOhm, BOM_Manufacturer Part=0603WAF2401T5E, BOM_Supplier=LCSC, BOM_Supplier Part=C22940, nameAlias="Resistance (Ohms)", SMT Type=Basic, spicePre=R, spiceSymbolName=0603WAF2401T5E
R19: BOM_JLCPCB SMD=Yes, BOM_Manufacturer=UniOhm, BOM_Manufacturer Part=0603WAF5101T5E, BOM_Supplier=LCSC, BOM_Supplier Part=C23186, nameAlias="Resistance (Ohms)", SMT Type=Basic, spicePre=R, spiceSymbolName=0603WAF5101T5E
R50 R51 R52 R54 R59: library part 10K, BOM_JLCPCB SMD=Yes, BOM_Manufacturer=UniOhm, BOM_Manufacturer Part=0603WAF1002T5E, BOM_Supplier=LCSC, BOM_Supplier Part=C25804, nameAlias="Resistance (Ohms)", SMT Type=Basic, spicePre=R, spiceSymbolName=0603WAF1002T5E
S1: "DIP Switch", LatestRevisionDate=17-Jul-2002, LatestRevisionNote="Re-released for DXP Platform.", PackageReference=DIP-8, Published=24-Mar-1999, Publisher="Altium Limited"
SWD: BOM_JLCPCB SMD=Yes, BOM_Manufacturer=ZHENGLING, BOM_Manufacturer Part=Z-211-0411-0021-001, BOM_Supplier=LCSC, BOM_Supplier Part=C152150, Contributor=LCSC, SMT Type=Extend, spicePre=H, spiceSymbolName=Z-211-0411-0021-001
U1: BOM_JLCPCB SMD=Yes, BOM_Manufacturer=STMicroelectronics, BOM_Manufacturer Part=STM32F103C8T6, BOM_Supplier=LCSC, BOM_Supplier Part=C8734, image=//image.lceda.cn/szlcsc/C8734.jpg, SMT Type=Basic, spicePre=U, spiceSymbolName=STM32F103C8T6, timeStamp=1455028086
U2 U3: BOM_JLCPCB SMD=Yes, BOM_Manufacturer=EXAR, BOM_Supplier=LCSC, spicePre=U
  U2: BOM_Manufacturer Part=SP3232EEN-L/TR, BOM_Supplier Part=C9378, image=//image.lceda.cn/szlcsc/C9378.jpg, SMT Type=Extend, spiceSymbolName=SP3232EEN-L/TR
  U3: BOM_Manufacturer Part=SP3485EN-L/TR, BOM_Supplier Part=C8963, image=//image.lceda.cn/szlcsc/C8963.jpg, SMT Type=Basic, spiceSymbolName=SP3485EN-L/TR
U4 U8: BOM_JLCPCB SMD=Yes, BOM_Manufacturer="Cixi Kefa Elec", BOM_Manufacturer Part=KF128L-3.5-2P, BOM_Supplier=LCSC, BOM_Supplier Part=C474930, Contributor=LCSC, SMT Type=Extend, spicePre=U, spiceSymbolName=KF128L-3.5-2P
U5: BOM_JLCPCB SMD=Yes, BOM_Manufacturer="Youtai Semiconductor Co., Ltd.", BOM_Manufacturer Part=SN74LVC1G14DBVR, BOM_Supplier=LCSC, BOM_Supplier Part=C434069, Contributor=LCSC, SMT Type=Extend, spicePre=U, spiceSymbolName=SN74LVC1G14DBVR_C434069
U9 U10: BOM_LCSC Assembly=Yes, BOM_Manufacturer=TI, BOM_Manufacturer Part=LM2596SX-ADJ/NOPB, BOM_Supplier=LCSC, BOM_Supplier Part=C29781, image=//image.lceda.cn/szlcsc/C52684.jpg, SMT Type=Extend, spicePre=U, spiceSymbolName=LM2596R-ADJ
U12 U15 U16: BOM_JLCPCB SMD=Yes, BOM_Manufacturer=DIBO, BOM_Manufacturer Part=DB128V-7.5-2P, BOM_Supplier=LCSC, BOM_Supplier Part=C395865, Contributor=LCSC, SMT Type=Extend, spicePre=U, spiceSymbolName=DB128V-7.5-2P
U13: BOM_JLCPCB SMD=Yes, BOM_Manufacturer=AMS, BOM_Manufacturer Part=AMS1117-3.3, BOM_Supplier=LCSC, BOM_Supplier Part=C6186, image=//image.lceda.cn/szlcsc/C6186.jpg, SMT Type=Basic, sourceId=dwIGgezVh, spicePre=U, spiceSymbolName=AMS1117-3.3, timeStamp=1476261164
U17 U18: library part SOP-16
U19: library part PCA82C250, "CAN收发"
X2: BOM_JLCPCB SMD=Yes, BOM_Manufacturer=EPSON, BOM_Manufacturer Part=Q13FC1350000400, BOM_Supplier=LCSC, BOM_Supplier Part=C32346, nameAlias=Frequency, SMT Type=Basic, spicePre=X, spiceSymbolName=Q13FC1350000400
X3: BOM_Manufacturer=YXC, BOM_Manufacturer Part=X49SM8MSD2SC, BOM_Supplier=LCSC, BOM_Supplier Part=C12674, nameAlias=Frequency, spicePre=X, spiceSymbolName=X49SM8MSD2SC

## Via types
v1: diameter 30, hole 20, Top Layer to Bottom Layer, 123 vias
v2: diameter 50, hole 28, Top Layer to Bottom Layer, 5 vias
v3: diameter 118.11, hole 118.11, Top Layer to Bottom Layer, 4 vias
v4: diameter 20, hole 10, Top Layer to Bottom Layer, 1 vias

## Nets (pads, with @x,y where several pads share a name; then routed paths per layer and width w, separated by ;. In a path a pad name is that pad's centre, name@x,y a point inside that pad or via, vN(x,y) a via of type N, cw(c..) or ccw(c..) an arc to the next point about the centre after c; other vN are vias at no path point)
485A: R57.2 R59.1 U3.7 U4.1 | length 675.6
  Top Layer w20: U3.7@3935,4901.52 3935,4980 4051.1,5096.1 4051.1,5195.94 4117.23,5129.81 v1(4117.23,4980)
  Bottom Layer w20: v1(4117.23,4890.22) v1(4117.23,4980)
485B: R58.1 R59.2 U3.6 U4.2 | length 602.6
  Top Layer w20: U3.6@3985,4901.52 3985,4946.31 4003.69,4965 4075,4965 4107.04,4932.96 4184.28,4932.96 4185.08,4932.15 ; U4.2@4188.9,5220 4185.08,5216.19 4185.08,4932.15 ; R58.1@4197.23,4890.22 4197.23,4920 4185.08,4932.15
+3V3: C9.1 C10.1 C12.2 C13.2 C16.2 C17.2 C18.2 C19.2 C20.2 H2.1 LED1.1 LED2.1 LED3.1 LED4.1 R3.1 R4.2 R5.2 R8.1 R9.1 R10.2 R16.2 R18.2 R24.2 R25.2 R26.2 R27.2 R28.2 R53.1 R55.1 R56.1 R58.2 SWD.4 U1.24 U1.36 U1.48 U2.16 U3.8 U5.5 U13.4 U18.10 U18.12 U18.14 U18.16 | length 20743.2
  Top Layer w10: R8.1@1800,4729.65 1800,4813.85 v1(1801.35,4815.19) ; R9.1@1800,5169.65 1800,5258.65 v1(1801.35,5260) ; R3.1@1805.84,4304.85 v1(1805.84,4400) ; v1@1837.79,3417.79 v1(1840,3420) ; R5.2@2084.6,3600 2094.05,3600 2137.87,3643.82 2181.98,3643.82 2255.16,3717 2347.9,3717 2401.8,3770.9 U1.48@2432.21,3770.9 ; C9.1@2227.56,4560 v1(2380,4560) 2404.98,4560 2426.21,4538.77 U2.16@2426.21,4518.04 ; v1(2248.12,4085.64) 2482.71,4085.64 2492.61,4075.74 U1.36@2492.61,4049.5 ; 2311.62,2388.38 2319.12,2380.88 ; R28.2@2703.82,2385.88 R28.2@2708.82,2380.88 ; U1.24@2770.21,3988.1 2839.66,3988.1 2851.56,4000 2851.56,4071.56 2882.64,4102.64 3095.32,4102.64 3184.13,4013.82 ; 2842.48,2820 2842.85,2820 2842.85,2808.01 ; C16.2@3184.13,3893.64 C16.2@3187.33,3890.44
  Top Layer w20: v1@1837.79,3417.79 1661.02,3417.79 1622.5,3379.28 LED3.1@1622.5,3287.91 LED2.1@1622.5,3138.05 LED1.1@1622.5,2987.91 1622.5,2880.07 ; v1(2084.6,3460) R4.2@2084.6,3527.64 R5.2@2084.6,3600 ; H2.1@2180,1817.22 1717.78,1817.22 1622.5,1912.5 1622.5,2880.07 ; 2311.62,2388.38 R10.2@2311.62,2880.07 R18.2@2110.6,2880.07 R24.2@2011.62,2880.07 1622.5,2880.07 ; 2319.12,2380.88 R25.2@2408.82,2380.88 ; R25.2@2408.82,2385.88 R28.2@2703.82,2385.88 ; R28.2@2708.82,2380.88 2880,2552.06 2880,2620 ; 2842.48,2820 2842.85,2808.01 2842.85,2720 ; U18.10@2950.51,2620 2880,2620 ; U18.12@2950.51,2720 2842.85,2720 ; U18.14@2950.51,2820 2842.85,2820 2842.85,2902.85 2860,2920 U18.16@2950.51,2920 ; C16.2@3184.13,3893.64 3184.13,4013.82 3184.13,4260.09 3418.37,4494.33 v1(3471,4494.33) ; C19.2@3187.33,3640.47 C16.2@3187.33,3890.44 ; R56.1@3800.11,4649.65 C10.1@3800.11,4732.45 3832.45,4732.45 3900,4800 3955.19,4800 3885,4870.19 U3.8@3885,4901.52 3885,5285 3960,5360 4797.54,5360 4962.26,5195.28 v2(4962.26,5177.84) 4844.99,5177.84 C13.2@4769.8,5102.65 C18.2@4689.79,5102.65 C12.2@4613.61,5102.65 ; v1(4192.94,4777.23) 4197.23,4777.23 R58.2@4197.23,4830.91 ; v1(4515.08,4775.08) R55.1@4515.08,4780 R55.1@4520.36,4774.72 ; U5.5@4680.47,4815.19 LED4.1@4815.56,4815.19 4815.56,4864.44 v1(4780,4900) ; 2842.85,2720 2842.85,2657.15 2880,2620
  Bottom Layer w10: v1(1801.35,5260) v1@1813.78,5260 ; v1(3471,4494.33) 3471,4488.99 v1@3482.01,4500
  Bottom Layer w20: v1(1801.35,4815.19) 1740,4815.19 ; v1@1813.78,5260 2140,4933.78 2140,4660 2240,4560 v1(2380,4560) 2248.12,4428.12 v1(2248.12,4085.64) ; v1(1840,3420) 2044.6,3420 v1(2084.6,3460) ; H2.1@2180,1817.22 1808.62,1817.22 1560,2065.84 1560,3800 1587.64,3827.64 SWD.4@1635,3827.64 1635,4229.16 v1(1805.84,4400) 1740,4465.84 1740,4815.19 ; v1@3482.01,4500 3860,4500 3980,4620 3980,4772.63 3832.63,4920 3300,4920 2920,5300 1841.35,5300 v1(1801.35,5260) 1740,5198.65 1740,4815.19 ; v1(3960,4795.02) 3977.78,4777.23 v1(4192.94,4777.23) ; v1(4349.65,4700) 4495.02,4700 4515.08,4720.07 v1(4515.08,4775.08) 4739.89,4775.08 4780,4815.19 v1(4780,4900) 4780,4995.58 v2(4962.26,5177.84)
+5V: C11.1 C40.2 H3.2 P?.1 R21.2 R51.1 U13.3 U19.3 | length 3216.4
  Top Layer w10: R51.1@3003.2,4347.7 3132.27,4347.7 3305.98,4521.4 U19.3@3305.98,4584.98 ; C11.1@5228.14,5040.02 C11.1@5231.5,5036.66
  Top Layer w20: U19.3@3305.98,4584.98 3305.98,4676.32 3329.66,4700 3383.5,4700 3480,4796.5 3480,4880 3617.63,5017.63 P?.1@3774.1,5017.63 ; U13.3@5052.81,4951.86 5052.81,5014.35 5120,5081.54 v1(5120,5140) 5186.9,5140 5228.14,5098.76 C11.1@5228.14,5040.02 ; R21.2@5231.5,4878.09 C11.1@5231.5,5036.66
  Bottom Layer w20: P?.1@3774.1,5017.63 3847.63,5017.63 3940.34,5110.34 4270.34,5110.34 4333.78,5173.78 H3.2@4487.37,5173.78 4536.23,5222.64 5037.36,5222.64 v1(5120,5140)
BOOT0: R2.1 U1.44 | length 438.6
  Top Layer w10: R2.1@2084.6,3680 2084.6,3715.36 2218.94,3849.7 U1.44@2432.21,3849.7
CAN_RX: R52.1 U1.32 | length 506.5
  Top Layer w10: U1.32@2571.41,4049.5 2571.41,4127.36 2585.24,4141.19 2615.24,4141.19 2672.4,4198.35 2798.35,4198.35 2872.3,4272.3 R52.1@2940,4272.3
CAN_TX: R51.2 U1.33 U19.1 | length 929
  Top Layer w10: U1.33@2551.71,4049.5 2551.71,4131.71 2578.19,4158.19 2608.19,4158.19 2665.35,4215.35 2788.72,4215.35 2921.06,4347.7 R51.2@2943.89,4347.7 2976.19,4380 3009.17,4380 3205.98,4576.81 U19.1@3205.98,4584.98